# Altium PCB Deck.PcbDoc
Units mm, origin at the board's own origin, x right, y up, seen from the top; angles counter-clockwise.
Board outline 29.4 x 30.25 mm, 2 copper layers (Top Layer, Bottom Layer); 39 components, 27 nets, 140 pads, 62 vias.
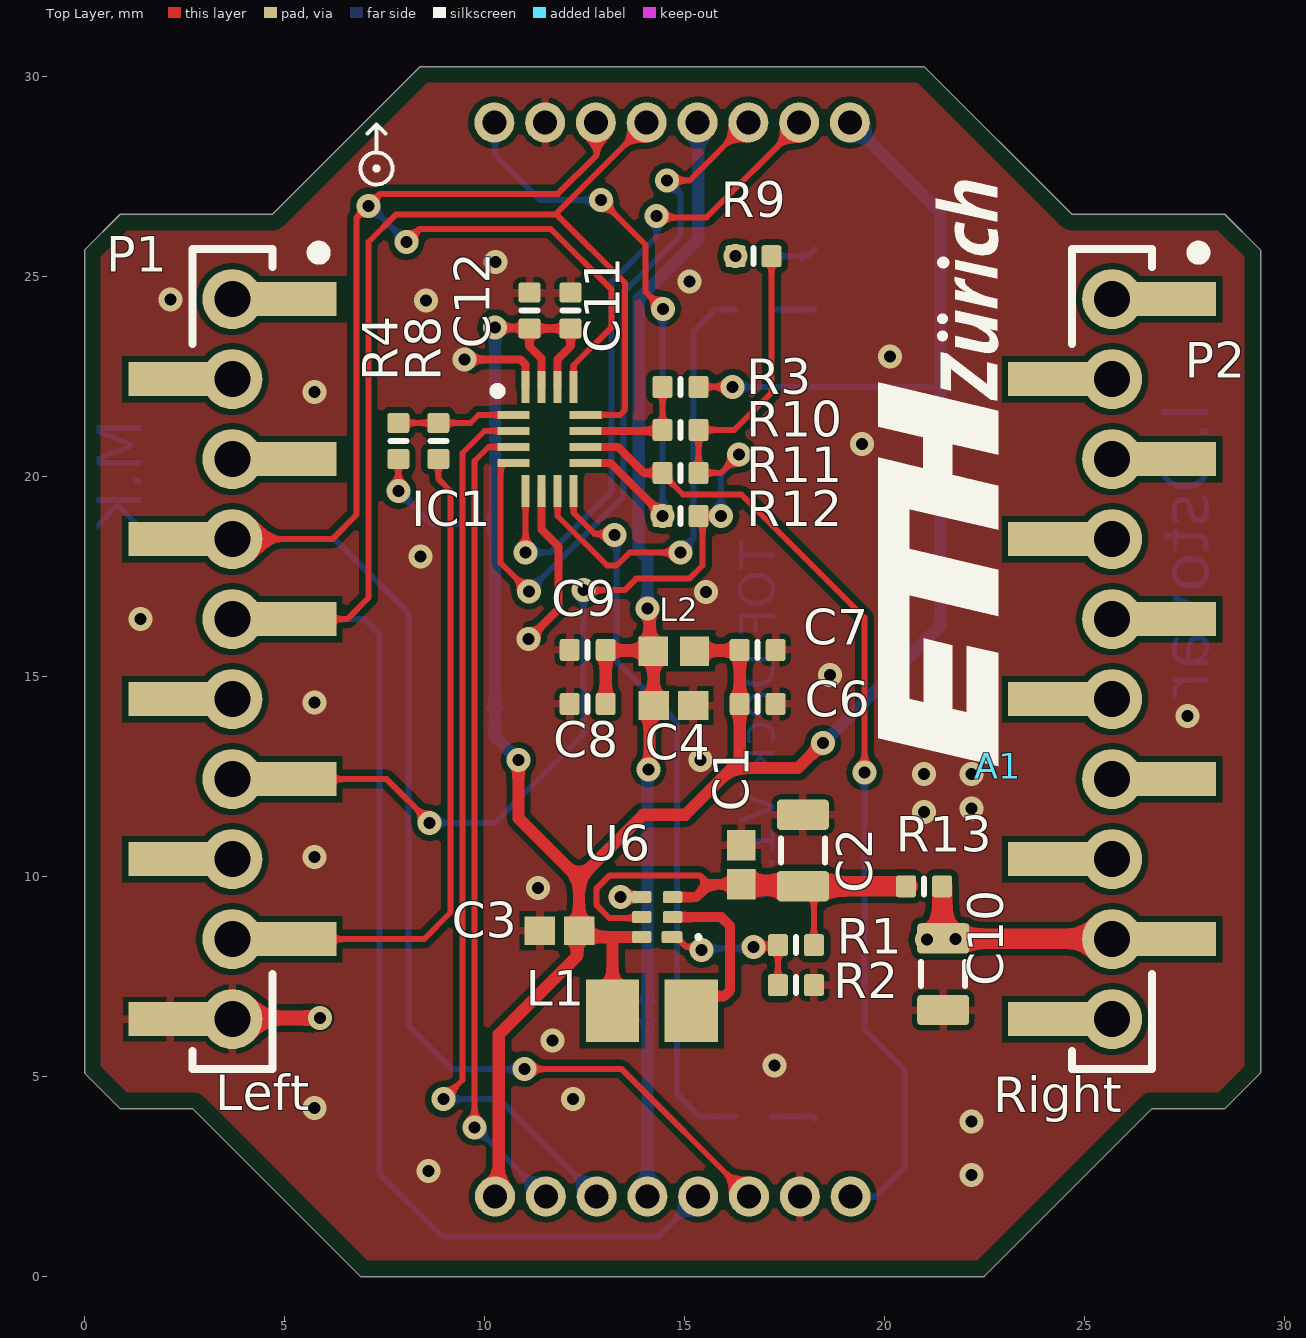
[diagram p0: Top Layer view]
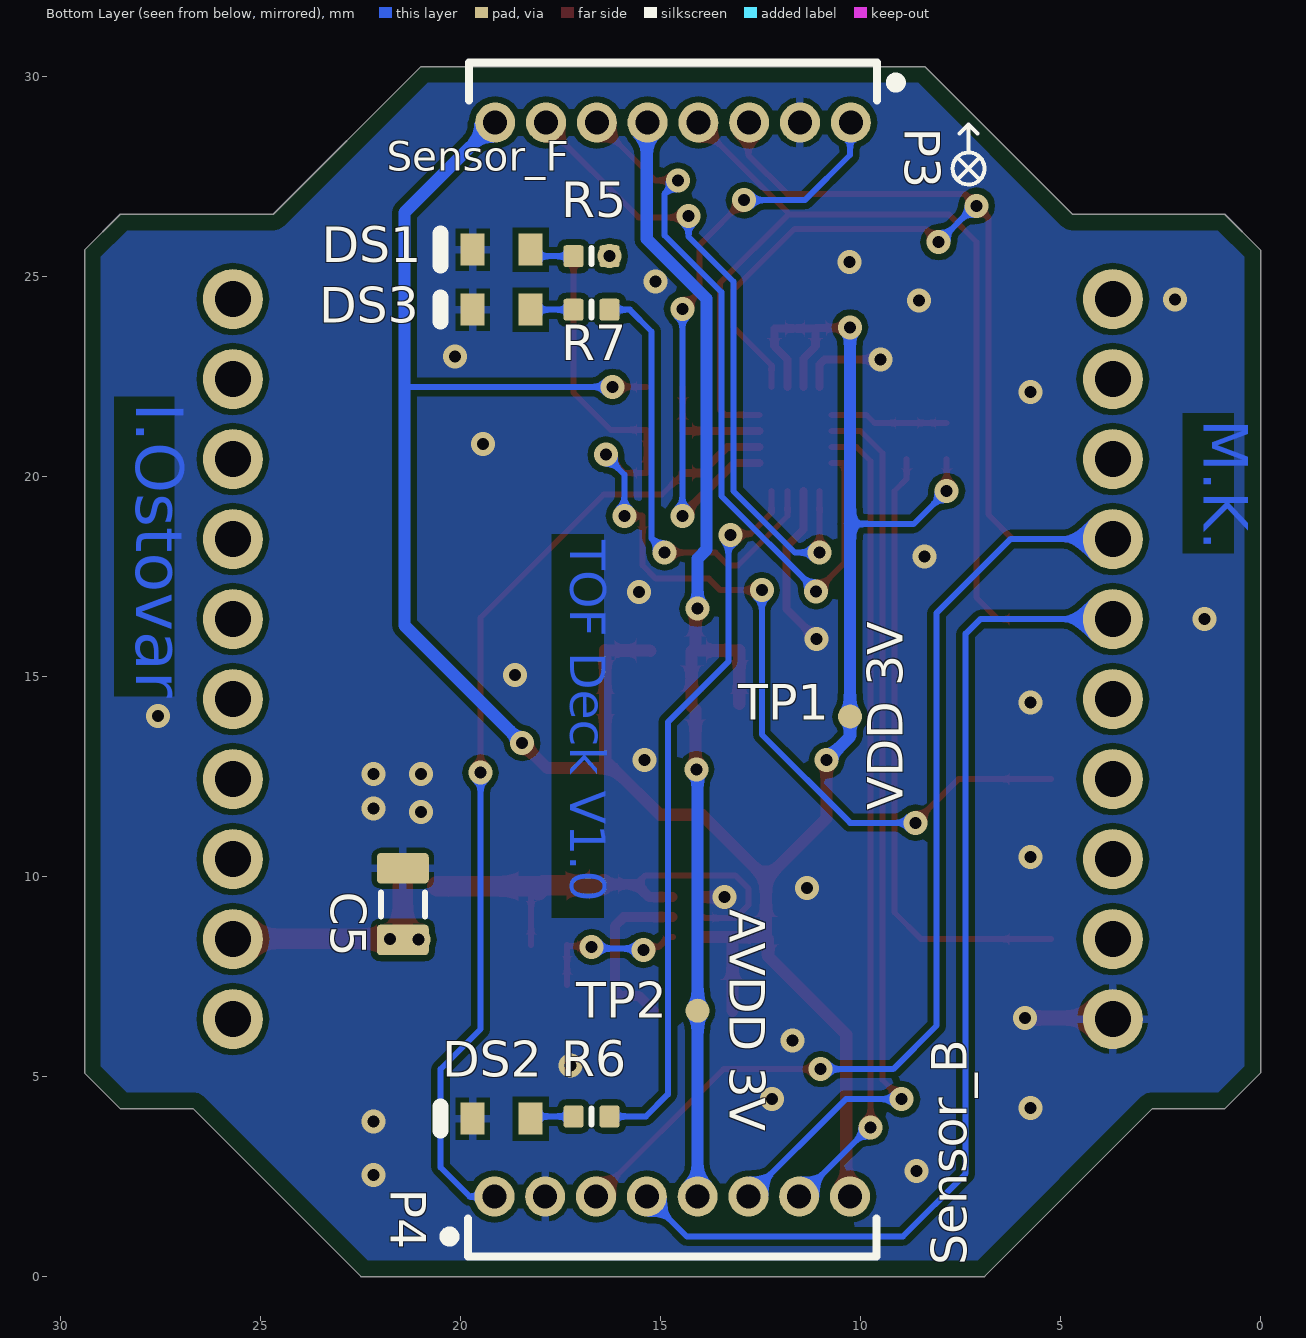
[diagram p1: Bottom Layer view, seen from below]
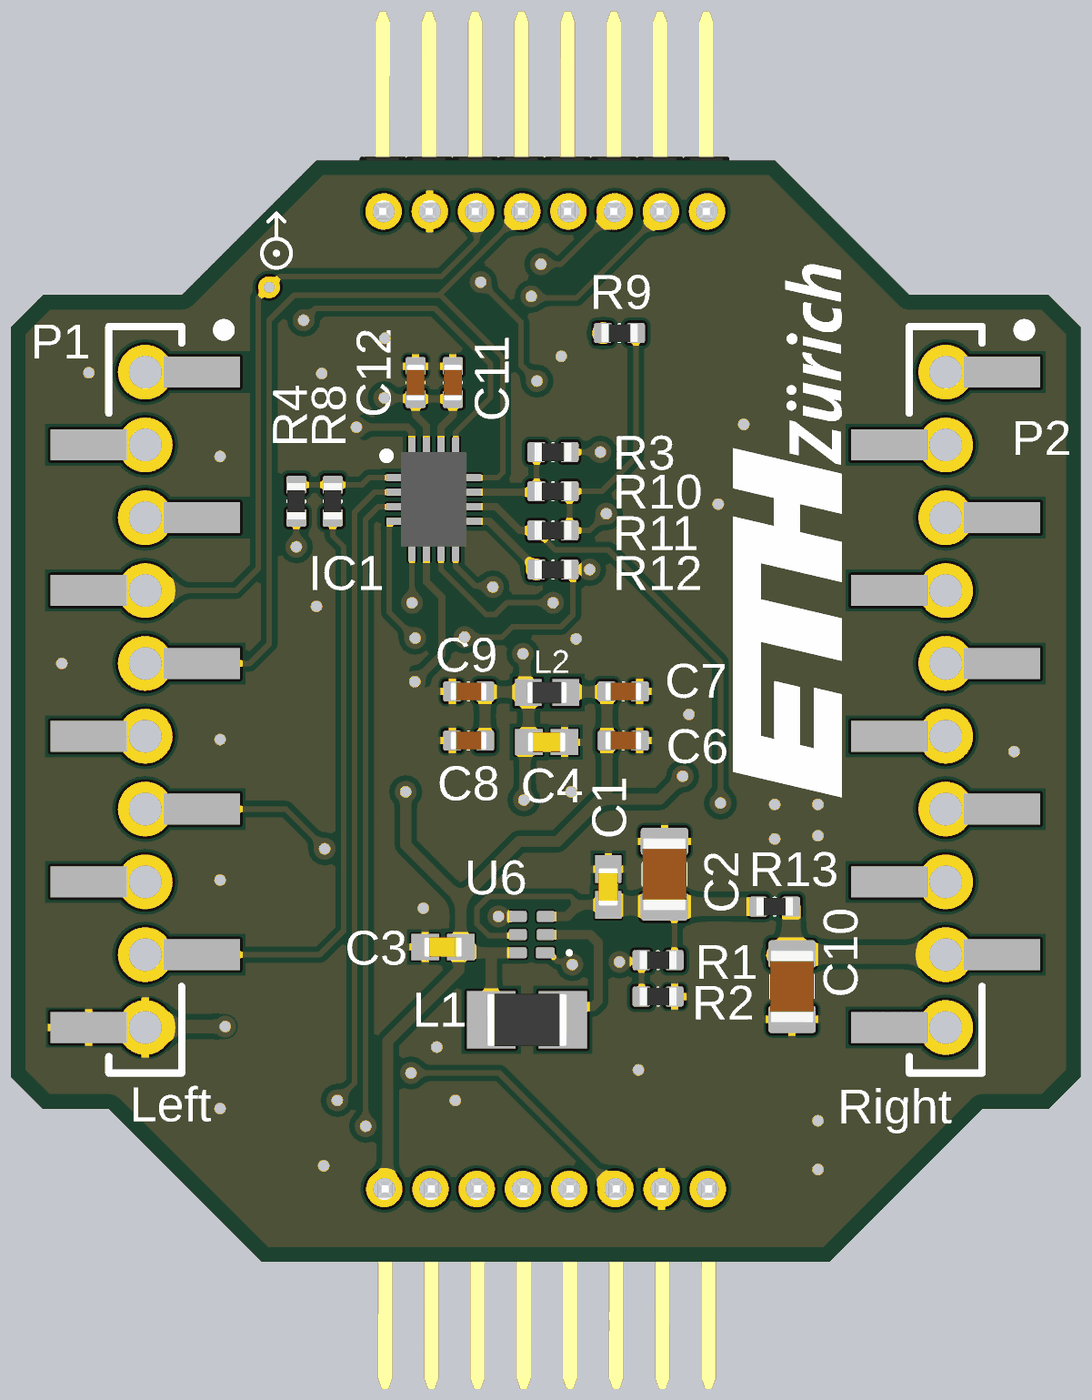
[diagram p2: 3D render of the assembled board from above, using the file's embedded part models]
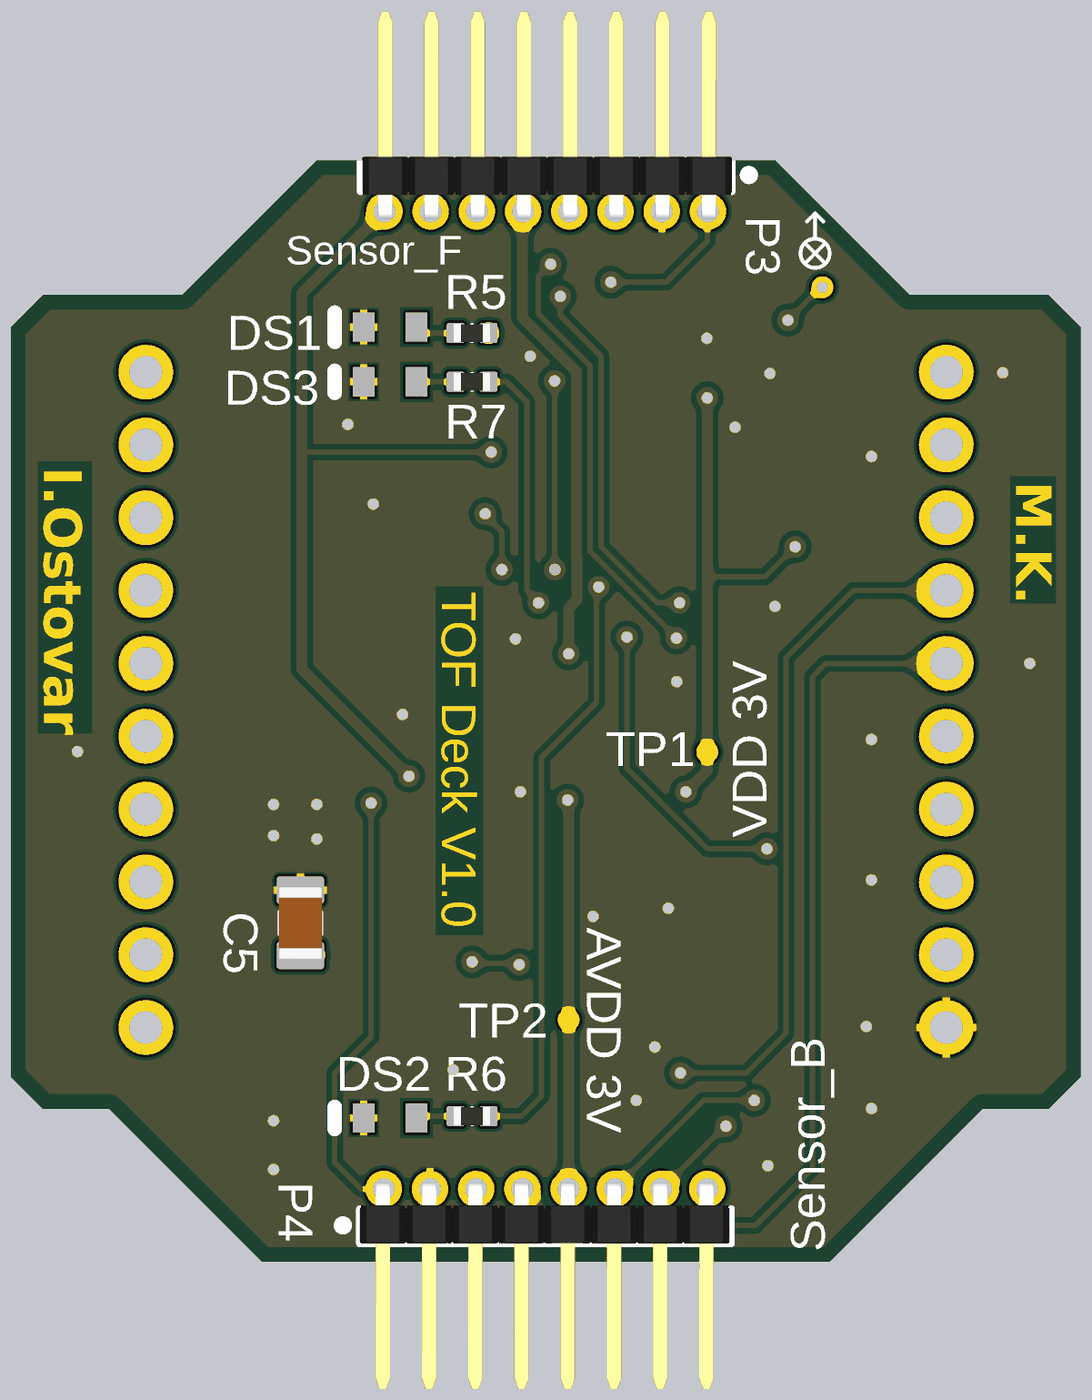
[diagram p3: 3D render of the assembled board from below, using the file's embedded part models]

## Layer stack, top to bottom
Top Solder: solder mask 0.01, Solder Resist, Dk 3.5
Top Layer: signal copper 0.036
Dielectric 1: prepreg 0.32, FR-4, Dk 4.1
Bottom Layer: signal copper 0.036
Bottom Solder: solder mask 0.01, Solder Resist, Dk 3.5

## Board outline
0.889,4.2 2.7,4.2 6.9,0 22.49,0 26.69,4.2 28.511,4.2 29.4,5.089 29.4,25.661 28.505,26.556 24.684,26.556 20.99,30.25 8.394,30.25 4.7,26.556 0.895,26.556 0,25.661 0,5.089

## Design rules (kind name [scope] priority, off if disabled: settings)
AcuteAngle [All] p1: minimum=6.00000000000000E+0001 checktracksonly=TRUE
BoardOutlineClearance [All] p1: gap=0 ignorepadtopadclearanceinfootprint=FALSE except(0.4: Poly-OutlineEdge)
Clearance [All] p1: gap=0.15 ignorepadtopadclearanceinfootprint=FALSE
ComponentClearance ComponentClearance_moreweirdtphole [InComponent('TP27') vs InComponent('U2')] p1: gap=0 collisioncheckmode=3 verticalgap=0 showdistances=FALSE
ComponentClearance ComponentClearance_weird_tp_holes [InComponent('TP25') vs InComponent('TP26')] p2: gap=0 collisioncheckmode=3 verticalgap=0 showdistances=FALSE
ComponentClearance ComponentClearance_TPunderlatch [InComponent('U2') vs InComponent('TP23') or InComponent('JP21') or InComponent('JP27') or InComponent('JP24') or InComponent('JP25') or InComponent('JP26')] p3: gap=0 collisioncheckmode=3 verticalgap=0 showdistances=FALSE
ComponentClearance ComponentClearance_NetTie [InComponentClass('NetTie')] p4: gap=0 collisioncheckmode=3 verticalgap=0 showdistances=TRUE
ComponentClearance ComponentClearance_Hole [InComponentClass('Holes, Screws etc.')] p5: gap=0 collisioncheckmode=3 verticalgap=0 showdistances=TRUE
ComponentClearance [All] p6: gap=0.152 collisioncheckmode=3 verticalgap=0.152 showdistances=TRUE
DiffPairsRouting [All] p1: maxlimit=0.381 minlimit=0.125 mostfreqgap=0.125 toplayer_minwidth=0.125 toplayer_maxwidth=0.381 toplayer_prefwidth=0.3 bottomlayer_minwidth=0.125 bottomlayer_maxwidth=0.381 bottomlayer_prefwidth=0.3 maxuncoupledlength=12.7
FabricationTestpoint [All] p1: side=3 testpointundercomponent=TRUE minsize=0.5 maxsize=2.54 preferedsize=1.524 minholesize=0 maxholesize=1.016 preferedholesize=0.813 testpointgrid=0.025 allowsidetop=TRUE allowsidebottom=TRUE usegrid=TRUE gridtolerance=0
FanoutControl Fanout_BGA_1 [InComponent('U1')] p1: bgadir=Out bgaviamode=Centered fanoutstyle=BGA fanoutdirection=Alternating viagrid=0.025 // Fanout_BGA (Default Rule)
FanoutControl Fanout_BGA [IsBGA] p2: bgadir=Out bgaviamode=Centered fanoutstyle=Auto fanoutdirection=Alternating viagrid=0.025 // Fanout_BGA (Default Rule)
FanoutControl Fanout_LCC [IsLCC] p3: bgadir=Out bgaviamode=Centered fanoutstyle=Auto fanoutdirection=Alternating viagrid=0.025 // Fanout_LCC (Default Rule)
FanoutControl Fanout_SOIC [IsSOIC] p4: bgadir=Out bgaviamode=Centered fanoutstyle=Auto fanoutdirection=Alternating viagrid=0.025 // Fanout_SOIC (Default Rule)
FanoutControl Fanout_Small [(CompPinCount < 5)] p5: bgadir=Out bgaviamode=Centered fanoutstyle=Auto fanoutdirection=OutThenIn viagrid=0.025 // Fanout_Small (Default Rule)
FanoutControl Fanout_Default [All] p6: bgadir=Out bgaviamode=Centered fanoutstyle=Auto fanoutdirection=Alternating viagrid=0.025 // Fanout_Default (Default Rule)
Height [All] p1: minheight=0 maxheight=50 prefheight=12.7
HoleSize [All] p1: absolutevalues=TRUE maxlimit=5 minlimit=0.3 maxpercent=80.000 minpercent=20.000
HoleToHoleClearance [All] p1: gap=0.25 allowstackedmicrovias=FALSE
Length "InNet('CLK_0') Or InNet('CLK_1')" [InNet('CLK_0') Or InNet('CLK_1')] p1: maxlimit=36.773 minlimit=0
MinimumAnnularRing MinimumAnnularRing_Vias_bga [Isvia and TouchesRoom('GAP')] p1: minimumring=0.1
MinimumAnnularRing MinimumAnnularRing_Vias [Isvia] p2: minimumring=0.124
MinimumAnnularRing [All] p3: minimumring=0.15
MinimumSolderMaskSliver [All] p1: minsoldermaskwidth=0.1
PlaneClearance "Mounting Holes" [InPadClass('ExtendedClearance')] p1: clearance=2.1
PlaneClearance [All] p2: clearance=0.2
PlaneConnect [All] p1: planeconnectstyle=Direct reliefexpansion=0.508 reliefentries=4 reliefconductorwidth=0.254 reliefairgap=0.254
PolygonConnect [All] p1: thpad.connectstyle=Relief thpad.reliefconductorwidth=0.2 thpad.reliefentries=4 thpad.polygonreliefangle="90 Angle" thpad.airgapwidth=0.125 smdpad.connectstyle=Relief smdpad.reliefconductorwidth=0.2 smdpad.reliefentries=4 smdpad.polygonreliefangle="90 Angle" smdpad.airgapwidth=0.125 via.connectstyle=Direct via.reliefconductorwidth=0.2 via.reliefentries=4 via.polygonreliefangle="45 Angle" via.airgapwidth=0.125
RoomDefinition Deck [InComponentClass('Deck')] p1: confinementstyle=ConfineIn formatcopy=TRUE lockcomponents=FALSE outline -93.9,-141.75 -43.1,-141.75 -43.1,-116.35 -93.9,-116.35
RoutingVias [All] p1: holewidth=0.3 width=0.6 viastyle="Through Hole" minholewidth=0.3 minwidth=0.6 maxholewidth=0.3 maxwidth=0.6
ShortCircuit ShortCircuit_variant_footprint [IsPad and not InAnyNet vs IsPad and not InAnyNet] p1: allowed=TRUE
ShortCircuit [All] p2: allowed=FALSE
SilkToSilkClearance "SilkText Exception" [OnSilkscreen  And (IsText And Not IsDesignator) vs OnSilkscreen  And ((IsText And Not IsDesignator) or IsTrack)] p1: silktosilkclearance=0
SilkToSilkClearance [All] p2: silktosilkclearance=0.01
SilkToSolderMaskClearance [IsPad] p1: minsilkscreentomaskgap=0.01 clearancetoexposedcopper=TRUE
SolderMaskExpansion [All] p1: expansion=0.075 istentingtop=FALSE
Width [All] p1: maxlimit=0.6 minlimit=0.15 preferedwidth=0.15 minimp=50.000000 maximp=50.000000 favimp=50.000000
13 further rules are at their usual default settings.

## Components (designator, comment, footprint, x,y, rotation, side; value= is the part's Value field where it differs from the comment)
A1 "Logo ETH Zurich" eth-zurich_3mm 22.84,12.752 r90 top
C1 "Capacitor 1 uF +/- 10% 6.3 V 1005" CAPC1005X55X25ML5T10 16.416,10.296 r270 top value=4.7µF
C2 "Capacitor 100µF +/-20% 6.3V 0805" CAPC0805(2012)145_L 17.961,10.646 r270 top value=100µF
C3 "Capacitor 1 uF +/- 10% 6.3 V 1005" CAPC1005X55X25ML5T10 11.875,8.645 r0 top value=4.7µF
C4 "Capacitor 1 uF +/- 10% 6.3 V 1005" CAPC1005X55X25ML5T10 14.725,14.275 r180 top value=4.7µF
C5 "Capacitor 100µF +/-20% 6.3V 0805" CAPC0805(2012)145_L 21.444,9.306 r270 bottom value=100µF
C6 "Capacitor 100nF +/-20% 25V 0402" CAPC0402(1005)60_L 16.83,14.315 r180 top value=1nF
C7 "Capacitor 100nF +/-20% 25V 0402" CAPC0402(1005)60_L 16.83,15.665 r180 top value=100nF
C8 "Capacitor 100nF +/-20% 25V 0402" CAPC0402(1005)60_L 12.58,14.315 r0 top value=10nF
C9 "Capacitor 100nF +/-20% 25V 0402" CAPC0402(1005)60_L 12.58,15.665 r0 top value=100nF
C10 "Capacitor 100µF +/-20% 6.3V 0805" CAPC0805(2012)145_L 21.468,7.562 r90 top value=100µF
C11 "Capacitor 100nF +/-20% 25V 0402" CAPC0402(1005)60_L 12.15,24.15 r270 top value=100nF
C12 "Capacitor 100nF +/-20% 25V 0402" CAPC0402(1005)60_L 11.125,24.15 r270 top value=100nF
DS1 "TLMS1100-GS08" VISH-TLMX1100_V 18.974,25.67 r0 bottom
DS2 "TLMY1100-GS08" VISH-TLMX1100-2_V 18.974,3.95 r0 bottom
DS3 "TLMB1100-GS08" VISH-TLMX1100-2_V 18.974,24.17 r0 bottom
IC1 "TCA6408ARSVR" QFN40P180X260X55-16N 11.625,20.939 r0 top
L1 "1.0uH 1A" INDC2013X105X50ML20T20 14.185,6.645 r180 top
L2 "LQP15MN3N6B02D" MURA-LQP15MN3N6B02D-2_M 14.735,15.635 r180 top value=ferrit(5-15ohm)
P1 "Left" PCBComponent_1 3.596,14.104 r0 top locked
P2 "Right" PCBComponent_1 25.592,14.104 r0 top locked
P3 "Sensor_F" M50-3930842 14.689,28.85 r0 bottom locked
P4 "Sensor_B" M50-3930842 14.707,2 r180 bottom locked
R1 "Resistor 47K5 +/-1 % 0402 63 mW" RESC0402(1005)_L 17.786,8.286 r180 top value=47k
R2 "Jumper 0402" RESC0402(1005)_L 17.786,7.286 r180 top value=0
R3 "Resistor 47K5 +/-1 % 0402 63 mW" RESC0402(1005)_L 14.9,22.239 r0 top value=47k
R4 "Resistor 47K5 +/-1 % 0402 63 mW" RESC0402(1005)_L 7.845,20.889 r270 top value=47k
R5 "Resistor 47K5 +/-1 % 0402 63 mW" RESC0402(1005)_L 16.724,25.508 r180 bottom value=100
R6 "Resistor 47K5 +/-1 % 0402 63 mW" RESC0402(1005)_L 16.724,4.001 r180 bottom value=100
R7 "Resistor 47K5 +/-1 % 0402 63 mW" RESC0402(1005)_L 16.724,24.17 r180 bottom value=100
R8 "Jumper 0402" RESC0402(1005)_L 8.845,20.889 r270 top value=0
R9 "Jumper 0402" RESC0402(1005)_L 16.724,25.508 r0 top value=0
R10 "Jumper 0402" RESC0402(1005)_L 14.9,21.164 r180 top value=0
R11 "Jumper 0402" RESC0402(1005)_L 14.9,20.089 r180 top value=0
R12 "Jumper 0402" RESC0402(1005)_L 14.9,19.014 r180 top value=0
R13 "Jumper 0402" RESC0402(1005)_L 20.99,9.756 r0 top value=0
TP1 "VDD 3V" TP06R 10.262,14 r90 bottom
TP2 "AVDD 3V" TP06R 14.072,6.645 r90 bottom
U6 "TPS62233DRYR" DRY0006A 14.316,8.986 r180 top

## Footprints (in the part's own frame and the unit in brackets; to place one, negate y for a bottom-side part, rotate by r counter-clockwise, add the part's x,y. Pads: shape width x height; smd on the part's side, far side on the other; paste and mask are expansions set on the pad)
CAPC0402(1005)60_L [mm] "Chip Capacitor, Body 1.0x0.5mm, Height 0.6mm, IPC High Density"
  rrect25% 0.5x0.55 smd: 1(-0.45,0) 2(0.45,0)
  silkscreen extent 0,-0.2 0,0.2, body extent -0.5,-0.25 0.5,0.25, height 0.6
CAPC0805(2012)145_L [mm] "Chip Capacitor, Body 2.0x1.2mm, Height 1.45mm, IPC High Density"
  rrect25% 0.76x1.3 smd: 1(-0.9,0) 2(0.89,0)
  silkscreen extent -0.3,-0.55 0.3,0.55, body extent -1,-0.6 1,0.6, height 1.45
CAPC1005X55X25ML5T10 [mm] "Chip Capacitor, 2-Leads, Body 1.05x0.55mm, IPC Low Density"
  rect 0.76x0.72 smd mask+0.05: 1(-0.49,0) 2(0.49,0)
  body extent -0.53,-0.28 0.53,0.28, height 0.55
DRY0006A [mm] "SON, 6-Leads, Body 1.45x1mm, Pitch 0.5mm"
  rrect33% 0.52x0.3 smd mask+0.05: 1(-0.37,0.5)
  rrect33% 0.49x0.3 smd mask+0.05: 2(-0.385,0) 3(-0.385,-0.5) 4(0.385,-0.5) 5(0.385,0) 6(0.385,0.5)
  silkscreen extent -1.08,0.45 -0.98,0.55, body extent -0.5,-0.72 0.5,0.72, height 0.6
eth-zurich_3mm [mm]
  silkscreen extent 0,0 14.65,3
INDC2013X105X50ML20T20 [mm] "Chip Inductor, 2-Leads, Body 2.2x1.45mm, IPC Low Density"
  rect 1.33x1.57 smd: 1(-0.985,0) 2(0.985,0)
  body extent -1.1,-0.72 1.1,0.72, height 1.05
M50-3930842 [mm] "Connector Header Through Hole, Right Angle 8 position 0.050\" (1.27mm)"
  round 1 hole 0.6: 1(-4.445,0) 2(-3.175,0) 3(-1.905,0) 4(-0.635,0) 5(0.635,0) 6(1.905,0) 7(3.175,0) 8(4.445,0)
  silkscreen extent -5.69,-1.5 5.1,-0.55, body extent -5.1,-5.5 5.06,0.2, height 2.11
MURA-LQP15MN3N6B02D-2_M [mm] "Chip Inductor, 2-Leads, Body 1.10x0.60mm, IPC Low Density"
  rect 0.73x0.74 smd: 1(-0.515,0) 2(0.515,0)
  body extent -0.55,-0.3 0.55,0.3, height 0.45
PCBComponent_1 [mm]
  round 1.5 hole 0.9: 1(0.098,10.332) 2(0.098,8.332) 3(0.098,6.332) 4(0.098,4.332) 5(0.098,2.332) 6(0.098,0.332) 7(0.098,-1.668) 8(0.098,-3.668) 9(0.098,-5.668) 10(0.098,-7.668)
  rect 2.1x0.85 smd: 1(1.648,10.332) 2(-1.452,8.332) 3(1.648,6.332) 4(-1.452,4.332) 5(1.648,2.332) 6(-1.452,0.332) 7(1.648,-1.668) 8(-1.452,-3.668) 9(1.648,-5.668) 10(-1.452,-7.668)
  silkscreen extent -0.9,-8.92 2.41,11.64, body extent -0.9,-8.92 1.1,11.58, height 3
QFN40P180X260X55-16N [mm]
  rect 0.8x0.2 smd mask+0.05: 1(-0.9,0.6) 2(-0.9,0.2) 3(-0.9,-0.2) 4(-0.9,-0.6) 9(0.9,-0.6) 10(0.9,-0.2) 11(0.9,0.2) 12(0.9,0.6)
  rect 0.2x0.8 smd mask+0.05: 5(-0.6,-1.3) 6(-0.2,-1.3) 7(0.2,-1.3) 8(0.6,-1.3) 13(0.6,1.3) 14(0.2,1.3) 15(-0.2,1.3) 16(-0.6,1.3)
  silkscreen extent -1.4,1.1 -1.2,1.3, body extent -0.9,-1.3 0.9,1.3, height 0.55
RESC0402(1005)_L [mm] "Chip Resistor, Body 1.0x0.5mm, IPC High Density"
  rrect25% 0.5x0.55 smd: 1(-0.45,0) 2(0.45,0)
  silkscreen extent 0,-0.2 0,0.2, body extent -0.5,-0.25 0.5,0.25, height 0.3
TP06R [mm] "Testpoint, round, d=0.6mm"
  round 0.6 smd paste-1: 1(0,0)
VISH-TLMX1100-2_V [mm] "SMD, 2-Leads, Body 1.6x0.8mm"
  rect 0.6x0.8 smd: 1(-0.725,0) 2(0.725,0)
  silkscreen extent 1.53,-0.3 1.53,0.3, body extent -0.8,-0.4 0.8,0.4, height 0.65
VISH-TLMX1100_V [mm] "SMD, 2-Leads, Body 1.6x0.8mm"
  rect 0.6x0.8 smd: 1(-0.725,0) 2(0.725,0)
  silkscreen extent 1.53,-0.4 1.53,0.4, body extent -0.8,-0.4 0.8,0.4, height 0.65

## Part data
A1: library part CMP-00038-1
C1 C3 C4: library part CMP-001-00009-6, "Chip Capacitor, 1 uF, +/- 10%, 6.3 V, 1005 (0402 Metric)", Capacitor Type=Ceramic, Case/Package=0402, Max Operating Temperature=85°C, Min Operating Temperature=-55°C, Tolerance=10%, Voltage Rating=6.3V, Mounting Technology=SM, Pins=2, RoHS Compliant=True
C2 C5 C10: library part CMP-001-00054-4, "Chip Capacitor, 100µF +/-20%, 6.3V, 0805, Thickness 1.45 mm", Case/Package=0805, Max Operating Temperature=85°C, Min Operating Temperature=-55°C, Tolerance=10%, Voltage Rating=6.3V, Mounting Technology=SMT, Pins=2
C6 C7 C8 C9 C11 C12: library part CMP-001-00065-4, "Chip Capacitor, 100nF +/-20%, 25V, 0402, Thickness 0.6 mm", Case/Package=0402, Max Operating Temperature=85°C, Min Operating Temperature=-55°C, Tolerance=10%, Voltage Rating=25V, Mounting Technology=SMT, Pins=2
DS1: library part CMP-007-00030-2, "Red Led, 20mA, 2.1 V, -40 to 100 degC, 2-Pin SMD (0603), RoHS, Tape and Reel", Case/Package=0603, Colour=Red, Forward Current=20mA, Forward Voltage=2.1V, Manufacturer="Vishay Semiconductor", Max Operating Temperature=100°C, Min Operating Temperature=-40°C, Package Description="2-Pin Surface Mount Device, Body 1.6 x 0.8 mm", Package Quantity=3000, Package Reference=TLMX1100, Power=90mW, Datasheet URL=http://www.vishay.com/docs/83173/tlmb1100.pdf, Datasheet Version="Rev. 2.7, 03/2016", Illumination Colour=Red, Lens Style=Clear, Luminous Intensity=63mcd, Manufacturer URL=http://www.vishay.com/, Mounting Technology=SM, Nominal Vf=2.1V, Packaging=TapeandReel, Pins=2, RoHS Compliant=True, Viewing Angle=160degrees
DS2: library part CMP-007-00031-2, "Yellow LED, 20 mA, 2.1 V, -40 to 100 degC, 2-Pin SMD (0603), RoHS, Tape and Reel", Case/Package=0603, Colour=Yellow, Forward Current=20mA, Forward Voltage=2.1V, Manufacturer="Vishay Semiconductor", Max Operating Temperature=100°C, Min Operating Temperature=-40°C, Package Description="2-Pin Surface Mount Device, Body 1.6 x 0.8 mm", Package Quantity=3000, Power=90mW, Datasheet URL=http://download.siliconexpert.com/pdfs/2016/8/7/12/43/26/667/vsh_/manual/379263299541529tlmb1100.pdf, Datasheet Version="Rev. 2.7, 03/2016", Illumination Colour=Yellow, Lens Style=Diffused, Luminous Intensity=80mcd, Manufacturer URL=http://www.vishay.com/, Mounting Technology=SM, Nominal Vf=2.1V, Package Reference=0603, Packaging=TapeandReel, Pins=2, RoHS Compliant=True, Viewing Angle=160degrees
DS3: library part CMP-007-00028-2, "Blue LED, 10 mA, 3.9 V, -40 to 100 degC, 2-Pin SMD (0603), RoHS, Tape and Reel", Case/Package=0603, Colour=Blue, Forward Current=10mA, Forward Voltage=3.9V, Manufacturer="Vishay Semiconductor", Max Operating Temperature=100°C, Min Operating Temperature=-40°C, Package Description="2-Pin Surface Mount Device, Body 1.6 x 0.8 mm", Package Quantity=3000, Power=68mW, Datasheet URL=http://download.siliconexpert.com/pdfs/2016/8/7/12/43/26/667/vsh_/manual/379263299541529tlmb1100.pdf, Datasheet Version="Rev. 2.7, 03/2016", Illumination Colour=Blue, Lens Style=Diffused, Luminous Intensity=5mcd, Manufacturer URL=http://www.vishay.com/, Mounting Technology=SM, Nominal Vf=3.9V, Package Reference=0603, Packaging=TapeandReel, Pins=2, RoHS Compliant=True, Viewing Angle=160degrees
IC1: "Integrated Circuit", Manufacturer_Name="Texas Instruments", Mouser Part Number=595-TCA6408ARSVR, Arrow Part Number=TCA6408ARSVR, Arrow Price/Stock=https://www.arrow.com/en/products/tca6408arsvr/texas-instruments?region=nac, Datasheet Link=http://www.ti.com/lit/gpn/tca6408a, Height=0.55mm, Manufacturer_Part_Number=TCA6408ARSVR, Mouser Price/Stock=https://www.mouser.co.uk/ProductDetail/Texas-Instruments/TCA6408ARSVR?qs=AFkNxQkJKAISZm6jGsM%252BSQ%3D%3D
L1: library part CMP-006-00000-3, "1.0uH 1150mA", Case/Package=0805, Current Rating=1.5A, Manufacturer=Murata, Max Operating Temperature=125°C, Min Operating Temperature=-55°C, Package Description="2-Pin Surface Mount Device, Body 2 x1.25 mm", Package Quantity=4000, Resistance=90mohm, Tolerance=25%, Core Material=Ferrite, Datasheet URL=http://psearch.en.murata.com/inductor/product/LQG15HS15NJ02_.pdf, Datasheet Version=Nov-11, Impedance=330Ohm, Max Current Rating=1.5A, Mounting Technology=SM, Package Reference=0805, Packaging=TapeandReel, RoHS Compliant=True
L2: library part CMP-006-00010-6, "Inductor, 500 MHz, 500 mA, 5 Ohm, -40 to 85 degC, 01005 (0402 Metric),", Case/Package=0402, Current Rating=170mA, Manufacturer=Murata, Max Operating Temperature=85°C, Min Operating Temperature=-40°C, Package Description="2-Pin Surface Mount Device, Body 1 x 0.5 mm", Package Quantity=10000, Self Resonant Frequency=6GHz, Core Material=Ferrite, Datasheet URL=http://download.siliconexpert.com/pdfs/2016/4/21/8/25/31/646/mrt_/manual/797549851250188lqp15mn3n6b0223.pdf, Datasheet Version=Apr-16, Mounting Technology=SM, Package Reference=0402, Packaging=TapeandReel, Q Factor=13, RoHS Compliant=True, Shielding=Unshielded
P1 P2: library part MHDR1X10, "Header, 10-Pin", LatestRevisionDate=17-Jul-2002, LatestRevisionNote="Re-released for DXP Platform.", Publisher="Altium Limited"
P3 P4: library part CMP-01380-1, "Connector Header Through Hole, Right Angle 8 position 0.050\" (1.27mm)", Current Rating=1A, Flammability Rating="UL94 V-0", Insulation Color=Black, Max Operating Temperature=105°C, Min Operating Temperature=-40°C, Connector Type="Header,Male Pin", Contact material=Brass, Contact Plating=Gold, Contact Shape=Square, Fastening Type=Push,Pull, Insulation Material=Nylon, Mount="Through Hole", Number of Positions=8, Number of Rows=1, Packaging=Bulk, Termination=Solder
R1 R3 R4 R5 R6 R7: library part CMP-009-00137-3, "Chip Resistor, 47,5 kOhms, +/-1 %, 63 mW, -55 to 155 degC, 0402", Case/Package=0402, Max Operating Temperature=155°C, Min Operating Temperature=-55°C, Power=63mW, Tolerance=1%, Pins=2
R2 R8 R9 R10 R11 R12: library part CMP-009-00148-3, Case/Package=0402, Max Operating Temperature=155°C, Min Operating Temperature=-55°C, Pins=2
R13: library part CMP-009-00148-3, "Current sensing jumper OR Fuse", Case/Package=0402, Max Operating Temperature=155°C, Min Operating Temperature=-55°C, Pins=2
TP1 TP2: library part CMP-00028-00002-2, "0.6mm round", Pins=1
U6: library part CMP-0323-00281-3, "Buck Step Down Regulator with 2.05 to 6 V Input and 3 V Output, -40 to 85 degC, 6-Pin SON (DRY), Green (RoHS & no Sb/Br)", Manufacturer="Texas Instruments", Rating=Catalog, Switch Current Limit(Typ)(A)=0.84, ComponentLink1Description=Datasheet, ComponentLink1URL=http://www.ti.com/general/docs/lit/getliterature.tsp?genericPartNumber=TPS62233&fileType=pdf, ComponentLink2Description="Package Specification", ComponentLink2URL=http://www.ti.com/litv/pdf/mpds221e, ComponentLink3Description="URL Link1", ComponentLink3URL="Samples URL:http://www.ti.com/product/tps62233#samples", DatasheetVersion=SLVS941E, Duty Cycle(Max)(%)=100, Eco-Plan="Green (RoHS & no Sb/Br)", Iout(Max)(A)=0.5, Iq(Typ)(mA)=0.022, Mounting Technology="Surface Mount", PackageDescription="6-Pin Plastic Small Outline No-Lead, 1 x 1.45 x 0.6 mm Body, 0.5 mm Pitch", PackageReference=DRY0006A, PackageVersion="revF, Dec-2011", PartNumber=TPS62233DRYR, Preset Vout(V)=3, Regulated Outputs(#)=1, SubFamily="Step-Down Regulator", Synchronous Rectification=False, Topology=Buck, Vin(Max)(V)=6, Vin(Min)(V)=2.05, Vout(Max)(V)=3, Vout(Min)(V)=3

## Via types
v1: diameter 0.6, hole 0.3, Top Layer to Bottom Layer, tented both sides, 61 vias
v2: diameter 0.6, hole 0.3, Top Layer to Bottom Layer, 1 vias

## Nets (pads, with @x,y where several pads share a name; then routed paths per layer and width w, separated by ;. In a path a pad name is that pad's centre, name@x,y a point inside that pad or via, vN(x,y) a via of type N, cw(c..) or ccw(c..) an arc to the next point about the centre after c; other vN are vias at no path point)
3V_in: P1.1
\INT_Exp: IC1.11 R3.1 R10.2 | length 3
  Top Layer w0.15: R10.2@14.427,21.14 R10.2 R3.1
  Top Layer w0.203: IC1.11 12.527,21.14 R10.2@14.427,21.14
\RESET: IC1.1 R4.1 R8.1 | length 3
  Top Layer w0.15: R4.1 R8.1 9.65,21.339 9.85,21.539 IC1.1
\RESET_u: P1.9 R8.2 | length 15.6
  Top Layer w0.15: P1.9@5.244,8.436 8.487,8.436 9.15,9.1 9.15,19.638 8.845,19.943 R8.2
AVDD: C4.2 C8.2 C9.2 L2.2 P3.5 P4.5 TP2.1 | length 30.3
  Top Layer w0.15: P3.5@15.532,28.904 P3.5@15.572,28.944
  Top Layer w0.305: C8.2 C9.2 13.045,15.65 14.205,15.65 L2.2 14.129,15.726 14.129,16.643 v1(14.072,16.699) ; v1(14.1,12.682) 14.128,12.71 14.128,14.168 C4.2 14.228,14.282 L2.2@14.228,15.627
  Bottom Layer w0.305: P4.5 TP2.1 14.072,12.654 v1(14.1,12.682) ; v1(14.072,16.699) 14.072,17.951 13.848,18.175 13.848,19.347 13.854,19.353 13.854,24.451 15.342,25.939 P3.5@15.342,28.85
GND: C1.1 C2.1 C3.1 C4.1 C5.1 C6.1 C7.1 C8.1 C9.1 C10.1 C11.1 C12.1 DS1.2 DS2.2 DS3.2 IC1.6 IC1.16 P1.10 P3.2 P4.2 R2.1 U6.4 | length 9.3
  Top Layer w0.203: v1(9.498,22.925) 10.898,22.925 11.023,22.799 11.023,22.24 IC1.16 ; v1(11.1,15.935) 11.849,16.684 11.849,18.249 11.425,18.674 IC1.6
  Top Layer w0.305: v1@13.255,9.486 U6.4
  Top Layer w0.381: P1.10@3.72,6.462 v1(5.891,6.462)
  Top Layer w0.508: P1.10@3.694,6.436 P1.10@3.72,6.462 ; P4.2 P4.2@17.882,2.133
  other v1: 22.18,2.537 8.597,2.639 22.18,3.874 5.75,4.211 12.215,4.434 17.245,5.271 11.705,5.899 13.4,9.486 11.334,9.711 5.75,10.485 20.99,11.615 22.18,11.704 20.99,12.561 22.18,12.561 15.396,12.909 27.569,14.016 5.75,14.346 18.636,15.035 1.4,16.436 15.534,17.112 8.4,18.002 19.438,20.812 5.75,22.118 20.14,23.002 8.543,24.4 2.144,24.42 15.126,24.871 10.277,25.366
I2C_RST_B: IC1.5 P3.7 | length 16.3
  Top Layer w0.15: v1(11.025,18.1) IC1.5 ; v1(14.301,26.518) 14.343,26.475 15.548,26.475 17.882,28.81 P3.7@17.882,28.85
  Bottom Layer w0.15: v1(11.025,18.1) 11.643,18.1 13.177,19.634 13.177,24.871 14.301,25.995 v1(14.301,26.518)
I2C_RST_F: IC1.3 P4.7 | length 20.3
  Top Layer w0.15: v1(9.75,3.725) 9.75,20.389 10.1,20.739 IC1.3
  Bottom Layer w0.15: v1(9.75,3.725) 9.779,3.725 11.504,2 P4.7
INT_Sens_B: IC1.9 P3.1 R12.2 | length 15
  Top Layer w0.15: v1(12.912,26.908) 14.023,25.797 14.023,24.619 14.45,24.192 v1(14.457,24.192)
  Top Layer w0.203: IC1.9 13.148,20.339 13.848,19.639 13.85,19.639 14.45,19.039 v1(14.45,19.014)
  Bottom Layer w0.15: P3.1@10.262,28.85 10.262,28.037 11.391,26.908 v1(12.912,26.908) ; v1(14.45,19.014) 14.453,19.017 14.453,24.189 v1(14.457,24.192)
INT_Sens_F: IC1.10 P4.1 R11.2 | length 24.6
  Top Layer w0.15: R11.2 14.45,20.064 14.963,19.551 16.423,19.551 19.5,16.474 v1(19.5,12.6)
  Top Layer w0.203: IC1.10 13.332,20.739 13.982,20.089 R11.2
  Bottom Layer w0.15: P4.1 19.771,2 20.499,2.729 20.499,5.183 19.5,6.183 v1(19.5,12.6)
IO_u: P1.7 R9.2 R10.1 R11.1 R12.1 | length 26.8
  Top Layer w0.15: P1.7@5.244,12.436 7.554,12.436 8.625,11.366 v1(8.625,11.344) ; v1(12.469,17.158) 13.503,17.158 13.793,17.448 15.122,17.448 15.449,17.775 15.449,19.014 v1(15.906,19.014) ; v1(16.365,20.548) 15.906,20.089 R11.1 R10.1 16.241,21.164 17.174,22.098 R9.2
  Bottom Layer w0.15: v1(8.625,11.344) 10.262,11.344 12.469,13.551 v1(12.469,17.158) ; v1(15.906,19.014) 15.906,20.052 16.365,20.511 v1(16.365,20.548)
LED1: R5.2 R9.1
  other v1: 16.274,25.508
LED2: IC1.8 R6.2 | length 18.1
  Top Layer w0.15: IC1.8 12.225,19.094 12.755,18.564 13.217,18.564 v1(13.245,18.536)
  Bottom Layer w0.15: v1(13.245,18.536) 13.303,18.477 13.303,15.372 14.816,13.859 14.816,4.554 15.369,4.001 R6.2
LED3: IC1.7 R7.2 | length 11.3
  Top Layer w0.15: IC1.7 11.825,19.014 13.063,17.776 13.303,17.776 13.628,18.1 v1(14.9,18.1)
  Bottom Layer w0.15: v1(14.9,18.1) 14.9,18.132 15.224,18.457 15.224,23.625 15.769,24.17 R7.2
LPn_B: IC1.4 P3.6 | length 18.4
  Top Layer w0.15: IC1.4 10.425,20.339 10.4,20.314 10.4,17.841 v1(11.11,17.13) ; v1(14.566,27.401) 15.127,27.401 16.575,28.85 P3.6@16.612,28.85
  Bottom Layer w0.15: v1(11.11,17.13) 11.11,17.143 13.477,19.51 13.477,24.608 14.9,26.031 14.9,27.067 v1(14.566,27.401)
LPn_F: IC1.2 P4.6 | length 22.7
  Top Layer w0.15: v1(8.971,4.434) 9.45,4.913 9.45,20.589 10,21.139 IC1.2
  Bottom Layer w0.15: v1(8.971,4.434) 10.369,4.434 P4.6
NetC1_2: C1.2 C2.2 R1.1 R13.1 U6.3 U6.5 | length 12.3
  Top Layer w0.15: U6.5 13.906,8.961 13.125,8.961 12.802,9.284 12.802,9.704 13.128,10.03 15.381,10.03 15.605,9.806 ; C2.2@17.936,9.781 C2.2 ; C2.2@18.061,9.656 18.236,9.481 R1.1
  Top Layer w0.254: U6.3 15.285,9.486 15.605,9.806 C1.2
  Top Layer w0.508: C1.2 16.441,9.781 C2.2@17.936,9.781 ; C2.2 C2.2@18.16,9.756 ; C2.2@18.061,9.656 C2.2@18.16,9.756 ; R13.1@20.58,9.756 R13.1 C2.2@18.16,9.756
NetDS1_1: DS1.1 R5.1 | length 1.1
  Bottom Layer w0.15: R5.1 18.087,25.508 DS1.1
NetDS2_1: DS2.1 R6.1 | length 1.1
  Bottom Layer w0.15: R6.1 18.198,4.001 DS2.1
NetDS3_1: DS3.1 R7.1 | length 1.1
  Bottom Layer w0.15: R7.1 DS3.1
NetL1_1: L1.1 U6.2 | length 4.3
  Top Layer w0.254: U6.2 15.918,8.986 16.141,8.763 16.141,7.16 15.992,7.011 15.536,7.011 L1.1
NetR1_2: R1.2 R2.2 U6.1 | length 3.8
  Top Layer w0.15: U6.1 14.796,8.486 15.032,8.25 15.343,8.25 v1(15.429,8.164) ; v1(16.724,8.238) 16.748,8.262 17.312,8.262 R1.2 R2.2
  Bottom Layer w0.15: v1(15.429,8.164) 15.466,8.201 16.687,8.201 v1(16.724,8.238)
SCL: IC1.12 P1.5 P3.4 P4.4 | length 52.2
  Top Layer w0.15: P1.5@5.244,16.436 6.565,16.436 7.1,16.971 7.1,25.862 7.783,26.545 11.81,26.545 ; IC1.12 13.386,21.539 13.518,21.671 13.518,24.837 11.81,26.545 ; P3.4@14.072,28.85 11.81,26.587 11.81,26.545
  Bottom Layer w0.15: P1.5@3.694,16.436 7.007,16.436 7.371,16.072 7.371,2.57 8.941,1 14.342,1 P4.4
SDA: IC1.13 P1.4 P3.3 P4.3 | length 54.4
  Top Layer w0.15: P1.4@3.694,18.436 6.19,18.436 6.8,19.046 6.8,26.47 v2(7.098,26.768) 7.395,27.065 11.832,27.065 12.802,28.035 12.802,28.756 12.755,28.803 P3.3@12.802,28.85 ; v1(8.046,25.862) 8.371,26.187 11.656,26.187 13.177,24.666 13.177,23.736 12.225,22.784 IC1.13 ; v1(10.998,5.186) 13.426,5.186 P4.3
  Bottom Layer w0.15: P1.4@3.694,18.436 6.254,18.436 8.097,16.593 8.097,6.275 9.186,5.186 v1(10.998,5.186) ; v2(7.098,26.768) 7.141,26.768 v1(8.046,25.862) v1@8.02,25.836 ; P3.3@13.032,28.708 P3.3@13.032,28.944
VCOM: C5.2 C10.2 P2.9 R13.2 | length 6
  Top Layer w0.508: v1(21.056,8.423) 21.071,8.438 v1(21.769,8.438) 21.776,8.444 25.682,8.444 P2.9@25.69,8.436 ; C10.2@21.302,8.436 21.444,8.578 21.444,9.752 R13.2
VDD: C3.2 C6.2 C7.2 C11.2 C12.2 IC1.14 IC1.15 L1.2 L2.1 P3.8 P4.8 R3.2 R4.2 TP1.1 U6.6 | length 71
  Top Layer w0.15: v1(7.845,19.639) R4.2 ; R3.2 R3.2 v1(16.201,22.24)
  Top Layer w0.203: v1(10.262,23.729) 10.277,23.715 11.11,23.715 C12.2 ; IC1.15 11.423,22.24 11.423,22.952 11.125,23.25 C12.2 ; IC1.14 11.825,22.925 12.15,23.25 C11.2 C12.2
  Top Layer w0.305: P4.8 10.357,2.095 10.357,6.052 12.311,8.006 12.311,8.438 12.362,8.488 C3.2@12.365,8.488 ; v1(10.85,12.909) 10.85,11.459 12.365,9.944 ; L1.2 13.2,8.423 13.135,8.488 ; U6.6 13.928,8.488 13.135,8.488 ; L2.1 15.265,15.65 16.365,15.65 C7.2 C6.2 16.38,12.909 16.18,12.71 ; v1(18.461,13.338) 17.832,12.71 16.18,12.71 ; C3.2@12.365,8.488 13.135,8.488 ; C3.2@12.365,8.488 C3.2 12.365,9.944 ; 12.365,9.944 13.967,11.546 15.016,11.546 16.18,12.71
  Bottom Layer w0.15: v1(7.845,19.639) 8.67,18.814 10.262,18.814 ; v1(16.201,22.24) 21.364,22.24 21.4,22.204
  Bottom Layer w0.305: v1(10.262,23.729) 10.262,18.814 TP1.1 10.262,13.497 v1(10.85,12.909) ; v1(18.461,13.338) 21.4,16.278 21.4,22.204 21.4,26.602 20.276,27.726 19.206,28.796 P3.8@19.152,28.85
VUSB: P2.10
pads on no net: P1.2 P1.3 P1.6 P1.8 P2.1 P2.2 P2.3 P2.4 P2.5 P2.6 P2.7 P2.8

## Polygon pours and split planes (outlines as drawn)
GND on Top Layer "GND_L01_P000" (solid, pour order 0): 0,25.661 0.895,26.556 4.7,26.556 8.394,30.25 20.99,30.25 24.69,26.55 28.499,26.55 28.505,26.556 29.4,25.661 29.4,5.089 28.511,4.2 26.69,4.2 22.49,0 6.9,0 2.7,4.2 0.889,4.2 0,5.089
GND on Bottom Layer "GND_L02_P001" (solid, pour order 1): 0,25.661 0,5.089 0.889,4.2 2.7,4.2 6.9,0 22.49,0 26.69,4.2 28.511,4.2 29.4,5.089 29.4,25.649 28.493,26.556 24.684,26.556 20.99,30.25 8.394,30.25 4.7,26.556 0.895,26.556

## Other copper
Bottom Layer:
  text "I.Ostovar" at 28.488,21.839 h2.03 r90
  text "M.K." at 1.776,21.426 h1.91 r90
  text "TOF Deck V1.0" at 17.559,18.406 h1.52 r90

## Silkscreen, mask and mechanical layers (free items; w line width, h text height)
Top Overlay:
  circle w0.1: c7.3,27.7 r0.05
  circle w0.1: c7.3,27.7 r0.4
  lines w0.1: 7.075,28.575 7.3,28.8 ; 7.3,28.1 7.3,28.8 ; 7.525,28.575 7.3,28.8
Bottom Overlay:
  circle w0.1: c7.3,27.7 r0.4
  lines w0.1: 7.025,27.425 7.575,27.975 ; 7.075,28.575 7.3,28.8 ; 7.3,28.1 7.3,28.8 ; 7.525,28.575 7.3,28.8 ; 7.575,27.425 7.025,27.975 ; 7.025,27.975 7.025,27.975
Bottom Solder:
  text "I.Ostovar" at 28.488,21.839 h2.03 r90
  text "M.K." at 1.776,21.426 h1.91 r90
  text "TOF Deck V1.0" at 17.559,18.406 h1.52 r90
Mechanical 4:
  the board outline again, w0
Mechanical 12:
  lines w0.127: 20,30.25 20.075,30.25 ; 24.684,26.556 28.505,26.556 29.4,25.661 29.4,5.089 28.511,4.2 26.69,4.2 ; 24.69,26.55 20.99,30.25 8.394,30.25 4.7,26.556 0.895,26.556 0,25.661 0,5.089 0.889,4.2 2.7,4.2 6.9,0 22.49,0 26.69,4.2 ; 26.69,4.2 26.69,4.2